# EAGLE board anti1_mid (EAGLE 9.5.1)

Size 44.96 x 34.93 mm. Coordinates in mm from the lower left corner, seen from the top.
Outline: 6.22,23.74 arc-138 38.86,23.74 44.07,23.74 arc-45 42.17,6.59 36.45,6.59 arc-102 8.76,6.59 2.8,6.59 arc-45 0.89,23.74 6.22,23.74
Outline: circle at 22.48,17.39 radius 15.17
Copper layers (1*16): Top 0.035mm / dielectric 1.5mm / Bottom 0.035mm
Design rules "default": minimum track width 6mil, minimum drill 0.35mm, track to track 6mil, track to pad 6mil, pad to pad 6mil, via to via 6mil, smd to smd 6mil, copper to edge 40mil, drill to drill 6mil, minimum pad ring 10mil, minimum via ring 8mil, stop-mask expansion 4mil, vias tented up to drill 0mil, thermal gap 10mil

## Footprints (pad centres in the part's own frame; a part is rotated, then mirrored left to right if it is on the bottom)
1X01_NO_SILK = drill 1.016 pad 1.88: 1 0,0

## Placement (x,y rotation side)
E$3  [1X01_NO_SILK]  2.16,17.39 0 top
E$4  [1X01_NO_SILK]  42.8,17.39 0 top

## Library data of the parts
E$3 E$4 = SparkFun-Connectors